# Altium PCB IPOD_LCD.PcbDoc
Units mil, origin at the board's own origin, x right, y up, seen from the top; angles counter-clockwise.
Board outline 3937 x 2759 mil, 2 copper layers (Top Layer, Bottom Layer); 55 components, 90 nets, 319 pads, 1517 vias.
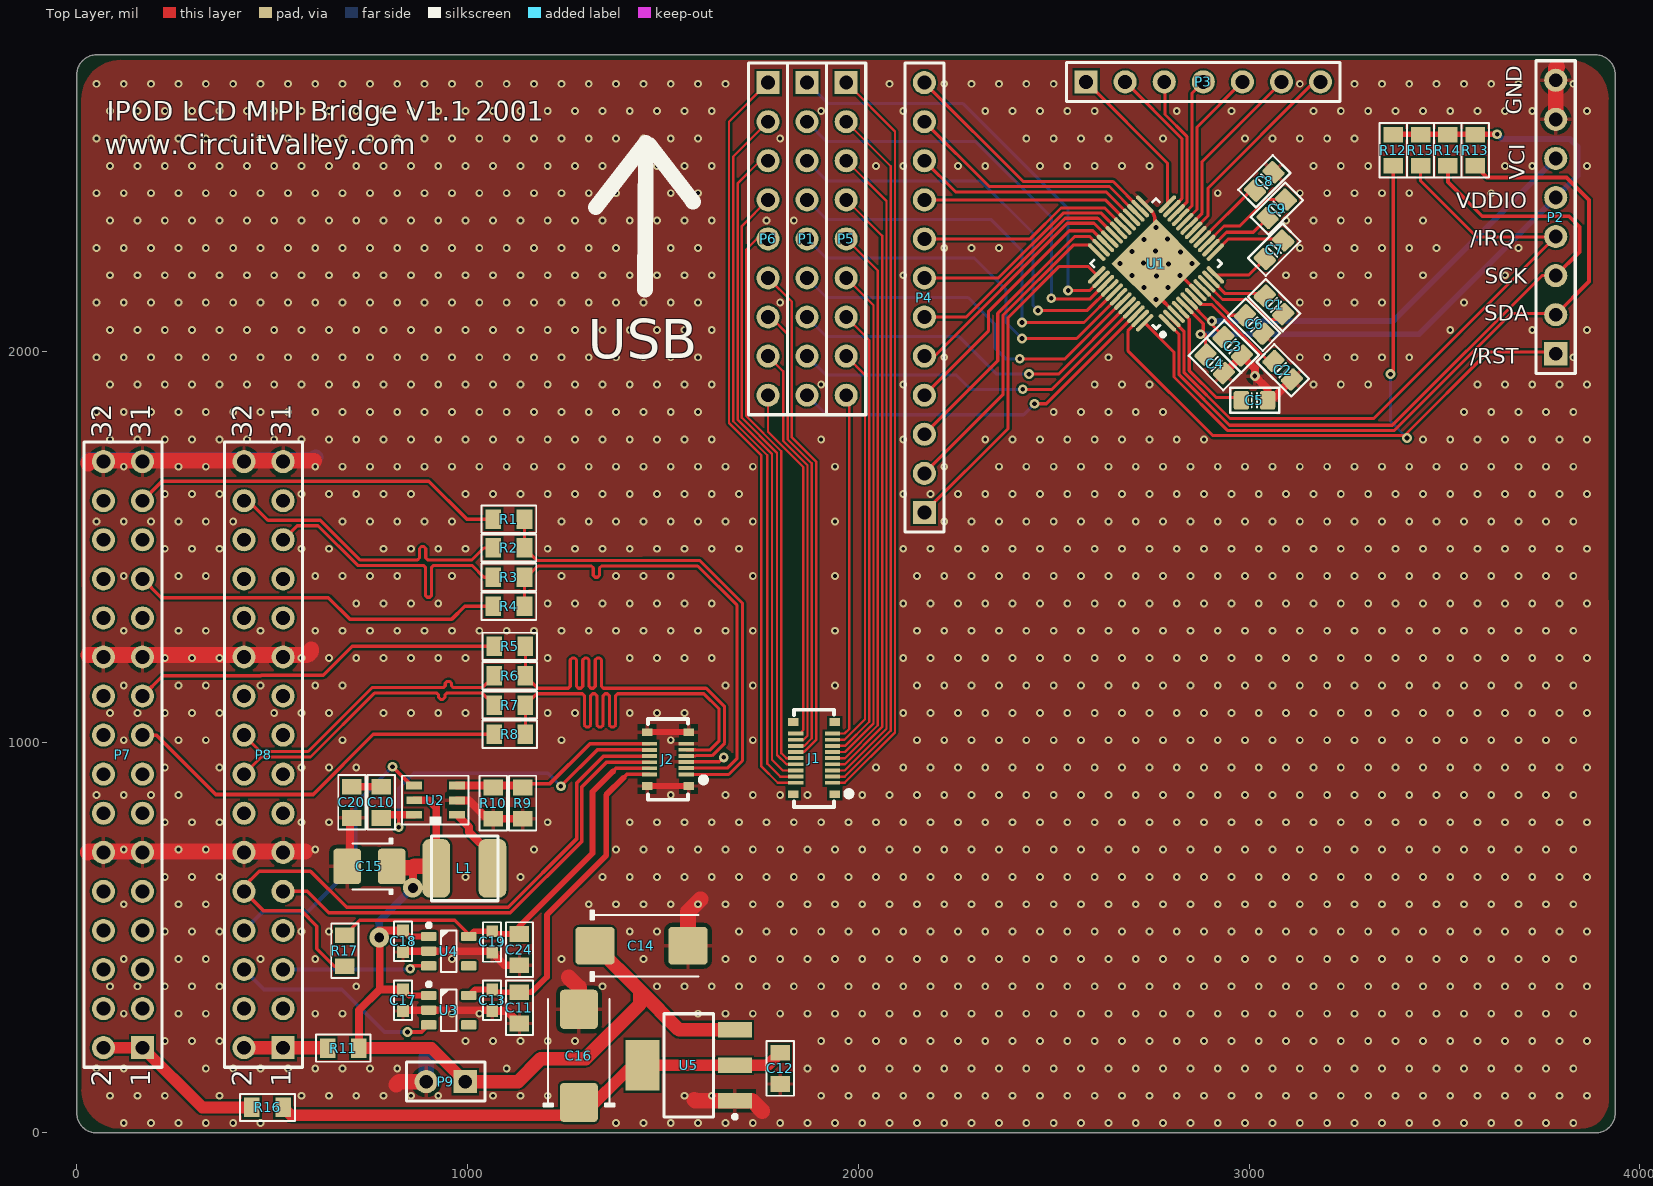
[diagram p0: Top Layer view]
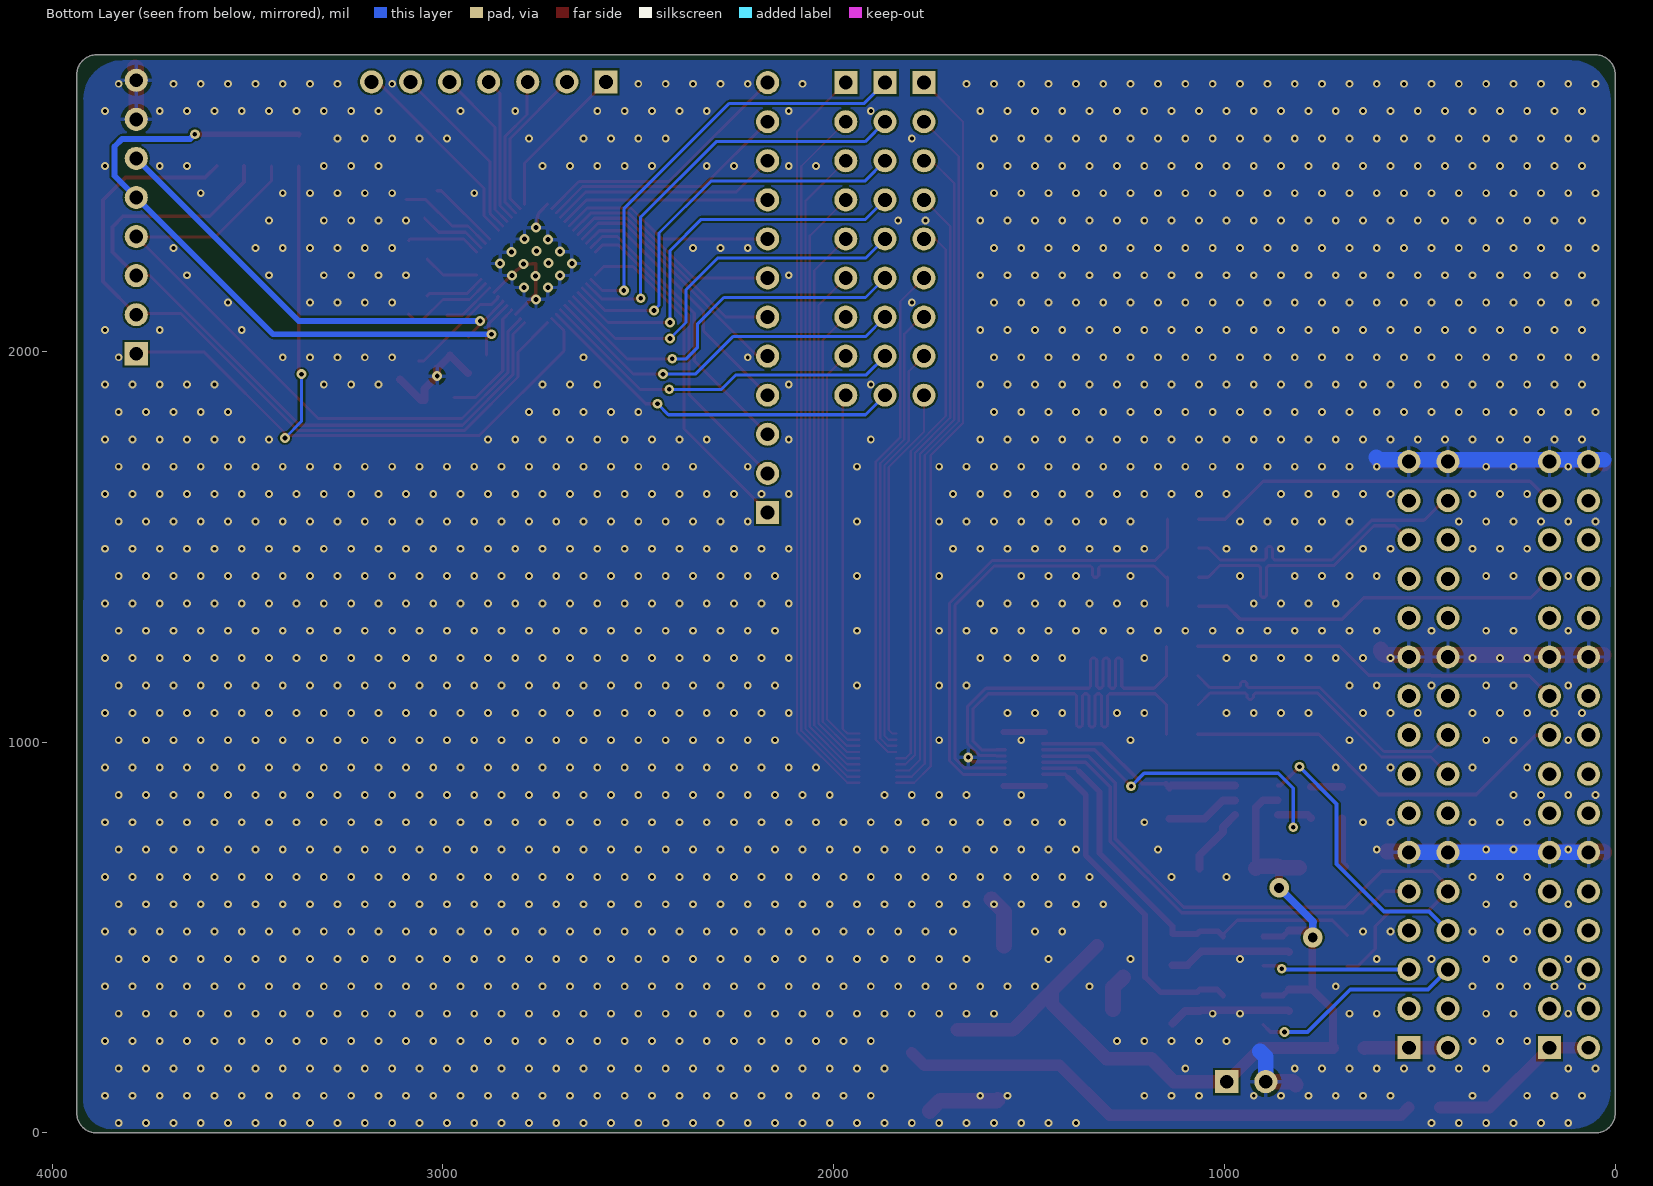
[diagram p1: Bottom Layer view, seen from below]

## Layer stack, top to bottom
Top Solder: solder mask 0.4, Solder Resist, Dk 3.5
Top Layer: signal copper 1.4
Dielectric 1: dielectric 12.6, FR-4, Dk 4.8
Bottom Layer: signal copper 1.4
Bottom Solder: solder mask 0.4, Solder Resist, Dk 3.5

## Board outline
0,50 0,2709 cw(c50,2709) 50,2759 3887,2759 cw(c3887,2709) 3937,2709 3937,50 cw(c3887,50) 3887,0 50,0 cw(c50,50)

## Design rules (kind name [scope] priority, off if disabled: settings)
Clearance [All] p1: gap=5
ComponentClearance [All] p1: gap=0 collisioncheckmode=3 verticalgap=0 showdistances=FALSE
DiffPairsRouting [All] p1: maxlimit=10 minlimit=6 mostfreqgap=6 toplayer_minwidth=6 toplayer_maxwidth=50 toplayer_prefwidth=10 bottomlayer_minwidth=6 bottomlayer_maxwidth=50 bottomlayer_prefwidth=10 maxuncoupledlength=500
MatchedLengths MIPI [InNetClass('MIPI')] p1: tolerance=10 checknetsindiffpair=TRUE checkdiffpairvsdiffpair=TRUE checkothers=TRUE
MatchedLengths MIPI2 [InNetClass('MIPI2')] p2: tolerance=10 checknetsindiffpair=TRUE checkdiffpairvsdiffpair=TRUE checkothers=TRUE
PolygonConnect [All] p1: connectstyle=Relief reliefconductorwidth=10 reliefentries=4 polygonreliefangle="90 Angle" airgapwidth=10
RoutingVias [All] p1: holewidth=12 width=25 viastyle="Through Hole" minholewidth=12 minwidth=25 maxholewidth=250 maxwidth=250
SolderMaskExpansion [All] p1: expansion=4
Width [All] p1: maxlimit=250 minlimit=6 preferedwidth=10
28 further rules are at their usual default settings.

## Classes and differential pairs
net class MIPI2: HS_CLK_N HS_CLK_P HS_DAT_N HS_DAT_P
net class MIPI: C_N C_P D_N D_P
differential pair C: +C_P -C_N
differential pair D: +D_P -D_N
differential pair HS_CLK: +HS_CLK_P -HS_CLK_N
differential pair HS_DAT: +HS_DAT_P -HS_DAT_N

## Components (designator, comment, footprint, x,y, rotation, side; value= is the part's Value field where it differs from the comment)
C1 "100n" CAPC1608N 3064,2119 r315 top
C2 "100n" CAPC1608N 3086,1952 r315 top
C3 "100n" CAPC1608N 2958,2013 r315 top
C4 "100n" CAPC1608N 2912,1968 r315 top
C5 "100n" CAPC1608N 3014,1875 r0 top
C6 "100n" CAPC1608N 3013,2069 r315 top
C7 "100n" CAPC1608N 3064,2260 r45 top
C8 "100n" CAPC1608N 3039,2435 r45 top
C9 "100n" CAPC1608N 3071,2365 r45 top
C10 "1uf" 0805C-TBD 778.76,815.99 r90 top
C11 "100n" 0805C-TBD 1132.76,349.99 r270 top
C12 "TBD" 0805C-TBD 1800,195 r270 top
C13 "100nf" 0603C-GENERIC 1062.76,311.99 r90 top
C14 "33uf 20V D" CAPMP7343X310N 1445,479 r0 top
C15 "10µ" CAPMP3528X210N 748.76,681.99 r180 top
C16 "33uf 20V D" CAPMP7343X310N 1285,197 r90 top
C17 "100nf" 0603C-GENERIC 834.76,311.99 r90 top
C18 "100nf" 0603C-GENERIC 834.76,462.99 r90 top
C19 "100nf" 0603C-GENERIC 1062.76,460.99 r90 top
C20 "1uf" 0805C-TBD 704,876 r270 top
C24 "100n" 0805C-TBD 1132.76,498.99 r270 top
J1 "5035481822" 5035481822 1886.76,958.99 r90 top
J2 "5035481222" 5035481222 1512.76,956.61 r90 top
L1 "10uH" IFSC-1515AH-01 992.76,676.99 r0 top
P1 "Header 9" HDR1X9 1868.65,2688 r270 top
P2 "Header 8" HDR1X8 3785,1994 r90 top
P3 "Header 7" HDR1X7 2583,2690 r0 top
P4 "Header 12" HDR1X12 2169,1588 r90 top
P5 "Header 9" HDR1X9 1969,2688 r270 top
P6 "Header 9" HDR1X9 1769,2688 r270 top
P7 "Header 16X2" HDR2X16 167.93,217.99 r90 top
P8 "Header 16X2" HDR2X16 527.76,217.99 r90 top
P9 "Header 2" HDR1X2 994,131 r180 top
R1 "110R" 0805R-GENERIC 1075.76,1570.99 r0 top
R2 "330R" 0805R-GENERIC 1075.76,1496.99 r0 top
R3 "330R" 0805R-GENERIC 1075.76,1421.99 r0 top
R4 "110R" 0805R-GENERIC 1075.76,1347.99 r0 top
R5 "110R" 0805R-GENERIC 1077.76,1244.99 r0 top
R6 "330R" 0805R-GENERIC 1077.76,1169.99 r0 top
R7 "330R" 0805R-GENERIC 1077.76,1094.99 r0 top
R8 "110R" 0805R-GENERIC 1077.76,1019.99 r0 top
R9 "47R" 0805R-GENERIC 1140.76,813.99 r90 top
R10 "22R" 0805R-GENERIC 1065.76,813.99 r90 top
R11 "0R" 0805R-GENERIC 711.76,216.99 r180 top
R12 "0R" 0805R-GENERIC 3369,2485 r90 top
R13 "0R" 0805R-GENERIC 3579,2485 r90 top
R14 "0R" 0805R-GENERIC 3509,2485 r90 top
R15 "0R" 0805R-GENERIC 3439,2485 r90 top
R16 "0R" 0805R-GENERIC 458,65 r0 top
R17 "10K" 0805R-GENERIC 686,436 r90 top
U1 "SSD2531QN5" QFN48_6x6_0.4 2762,2225 r135 top
U2 "MIC3289" SOT23-6 967.76,813.99 r180 top
U3 "MIC550x" SOT23-5 951.76,313.99 r0 top
U4 "MIC550x" SOT23-5 951.76,464.99 r0 top
U5 "TC2117-1.8VDBTR" SOT-223-DB3_N 1566,173 r180 top

## Footprints (in the part's own frame and the unit in brackets; to place one, negate y for a bottom-side part, rotate by r counter-clockwise, add the part's x,y. Pads: shape width x height; smd on the part's side, far side on the other; paste and mask are expansions set on the pad)
0603C-GENERIC [mil] "CAPACITOR 0603"
  rect 30x30 smd: 1(0,0) 2(55,0)
  silkscreen extent -23,-23 78,23, body extent -4,-15 59,15, height 19
0805C-TBD [mil] "CAPACITOR 0805"
  rect 40x50 smd: 1(-10,0) 2(70,0)
  silkscreen extent -40,-35 100,35, body extent -11,-25 70,25, height 26
0805R-GENERIC [mil] "RESISTOR 0805"
  rect 40x50 smd: 1(-10,0) 2(70,0)
  silkscreen extent -40,-35 100,35, body extent -11,-25 70,25, height 27
5035481222 [mm] "12 PIN IPOD LCD"
  rect 0.5x0.7 smd: 0(-1.75,-1.35) 0(-1.75,1.35) 0(1.75,-1.35) 0(1.75,1.35)
  rect 0.25x1 smd: 1(-1,-1.2) 2(-1,1.2) 3(-0.584,-1.2) 4(-0.6,1.2) 5(-0.178,-1.2) 6(-0.2,1.2) 7(0.203,-1.2) 8(0.2,1.2) 9(0.61,-1.2) 10(0.6,1.2) 11(1,-1.2) 12(1,1.2)
  silkscreen extent -2.64,-2.48 2.62,1.3, body extent -2.55,-1.3 2.55,1.3, height 0.67
5035481822 [mm] "IPOD Touch connector"
  rect 0.5x0.7 smd: 0(-2.35,-1.35) 0(-2.35,1.35) 0(2.35,-1.35) 0(2.35,1.35)
  rect 0.25x1 smd: 1(-1.6,-1.2) 2(-1.6,1.2) 3(-1.2,-1.2) 4(-1.2,1.2) 5(-0.8,-1.2) 6(-0.8,1.2) 7(-0.4,-1.2) 8(-0.4,1.2) 9(0,-1.2) 10(0,1.2) 11(0.4,-1.2) 12(0.4,1.2) 13(0.8,-1.2) 14(0.8,1.2) 15(1.2,-1.2) 16(1.2,1.2) 17(1.6,-1.2) 18(1.6,1.2)
  silkscreen extent -3.17,-2.43 3.15,1.3, body extent -3.15,-1.3 3.15,1.3, height 0.67
CAPC1608N [mm] "Chip Capacitor, Body 1.6x0.8mm, 0603, IPC Medium Density"
  round 0.254 on Mech14: 0(0,0)
  rrect25% 1x1.2 smd: 1(-0.85,0) 2(0.85,0)
  Top Layer pour cut-out: -0.4,0.6 0.4,0.6 0.4,-0.6 -0.4,-0.6
  silkscreen extent -1.57,-0.81 1.6,0.81, body extent -0.85,-0.45 0.85,0.45, height 0.89
CAPMP3528X210N [mm] "Molded body capacitor, Body 3.5x2.8mm, 1210, IPC Nominal settings"
  round 0.254 on Mech14: 0(0,0)
  rrect25% 1.8x2.3 smd: 1(-1.45,0) 2(1.45,0)
  Top Layer pour cut-out: -0.508,1.27 0.508,1.27 0.508,-1.27 -0.508,-1.27
  silkscreen extent -1.5,-1.8 1.1,1.8, body extent -1.75,-1.4 1.75,1.4, height 2.1
CAPMP7343X310N [mm] "Molded body capacitor, Body 7.3x4.3mm, 2917, IPC Nominal settings"
  round 1 on Mech14: 0(0,0)
  rrect20% 2.55x2.45 smd: 1(-3.025,0) 2(3.025,0)
  silkscreen extent -3.3,-2.3 3.7,2.3, body extent -3.8,-1.97 3.8,1.98, height 3.1
HDR1X2 [mm] "Connector; Header; 2 Position"
  rect 1.5x1.5 hole 0.9: 1(0,0)
  round 1.5 hole 0.9: 2(2.54,0)
  silkscreen extent -1.27,-1.27 3.81,1.27
HDR1X7 [mm] "Connector; Header; 7 Position"
  rect 1.5x1.5 hole 0.9: 1(0,0)
  round 1.5 hole 0.9: 2(2.54,0) 3(5.08,0) 4(7.62,0) 5(10.16,0) 6(12.7,0) 7(15.24,0)
  silkscreen extent -1.27,-1.27 16.51,1.27
HDR1X8 [mm] "Connector; Header; 8 Position"
  rect 1.5x1.5 hole 0.9: 1(0,0)
  round 1.5 hole 0.9: 2(2.54,0) 3(5.08,0) 4(7.62,0) 5(10.16,0) 6(12.7,0) 7(15.24,0) 8(17.78,0)
  silkscreen extent -1.27,-1.27 19.05,1.27
HDR1X9 [mm] "Connector; Header; 9 Position"
  rect 1.5x1.5 hole 0.9: 1(0,0)
  round 1.5 hole 0.9: 2(2.54,0) 3(5.08,0) 4(7.62,0) 5(10.16,0) 6(12.7,0) 7(15.24,0) 8(17.78,0) 9(20.32,0)
  silkscreen extent -1.27,-1.27 21.59,1.27
HDR1X12 [mm] "Connector; Header; 12 Position"
  rect 1.5x1.5 hole 0.9: 1(0,0)
  round 1.5 hole 0.9: 2(2.54,0) 3(5.08,0) 4(7.62,0) 5(10.16,0) 6(12.7,0) 7(15.24,0) 8(17.78,0) 9(20.32,0) 10(22.86,0) 11(25.4,0) 12(27.94,0)
  silkscreen extent -1.27,-1.27 29.21,1.27
HDR2X16 [mm] "Connector; Header; 16x2 Position"
  rect 1.5x1.5 hole 0.9: 1(0,0)
  round 1.5 hole 0.9: 2(0,2.54) 3(2.54,0) 4(2.54,2.54) 5(5.08,0) 6(5.08,2.54) 7(7.62,0) 8(7.62,2.54) 9(10.16,0) 10(10.16,2.54) 11(12.7,0) 12(12.7,2.54) 13(15.24,0) 14(15.24,2.54) 15(17.78,0) 16(17.78,2.54) 17(20.32,0) 18(20.32,2.54) 19(22.86,0) 20(22.86,2.54) 21(25.4,0) 22(25.4,2.54) 23(27.94,0) 24(27.94,2.54) 25(30.48,0) 26(30.48,2.54) 27(33.02,0) 28(33.02,2.54) 29(35.56,0) 30(35.56,2.54) 31(38.1,0) 32(38.1,2.54)
  silkscreen extent -1.27,-1.27 39.37,3.81
IFSC-1515AH-01 [mm] "Vishay Dale Low Profile, High Current Inductors"
  rrect50% 1.8x3.8 smd: 1(-1.85,0) 2(1.8,0)
  silkscreen extent -2.16,-2.11 2.16,2.11, body extent -1.97,-1.95 1.98,2, height 1.65
QFN48_6x6_0.4 [mm] "SSD2531"
  oval 1.5x0.27 smd: 1(-3.25,2.2) 2(-3.25,1.8) 3(-3.25,1.4) 4(-3.25,1) 5(-3.25,0.6) 6(-3.25,0.2) 7(-3.25,-0.2) 8(-3.25,-0.6) 9(-3.25,-1) 10(-3.25,-1.4) 11(-3.25,-1.8) 12(-3.25,-2.2) 25(3.25,-2.2) 26(3.25,-1.8) 27(3.25,-1.4) 28(3.25,-1) 29(3.25,-0.6) 30(3.25,-0.2) 31(3.25,0.2) 32(3.25,0.6) 33(3.25,1) 34(3.25,1.4) 35(3.25,1.8) 36(3.25,2.2)
  oval 0.27x1.5 smd: 13(-2.2,-3.25) 14(-1.8,-3.25) 15(-1.4,-3.25) 16(-1,-3.25) 17(-0.6,-3.25) 18(-0.2,-3.25) 19(0.2,-3.25) 20(0.6,-3.25) 21(1,-3.25) 22(1.4,-3.25) 23(1.8,-3.25) 24(2.2,-3.25) 37(2.2,3.25) 38(1.8,3.25) 39(1.4,3.25) 40(1,3.25) 41(0.6,3.25) 42(0.2,3.25) 43(-0.2,3.25) 44(-0.6,3.25) 45(-1,3.25) 46(-1.4,3.25) 47(-1.8,3.25) 48(-2.2,3.25)
  rect 4.1x4.1 smd: 49(0,0)
  silkscreen extent -3.71,-3.02 3.02,3.07, body extent -3.02,-3.02 3.02,3.02, height 0.68
SOT23-5 [mm]
  round 0.5 on Mech14: 0(0,0)
  rrect25% 1x0.6 smd: 1(-1.3,0.95) 2(-1.3,0) 3(-1.3,-0.95) 4(1.3,-0.95) 5(1.3,0.95)
  silkscreen extent -1.42,-1.35 0.51,1.81, body extent -1.4,-1.45 1.4,1.45, height 1.44
SOT23-6 [mil]
  rect 40x20 smd: 1(-5,0) 2(-5,-37) 3(-5,-75) 4(105,-75) 5(104.41,-37.4) 6(105,0)
  silkscreen extent -35,-100 135,25, body extent 2,-95 98,20, height 52
SOT-223-DB3_N [mm] "SOT223, 4-Leads, Body 6.5x3.5mm, Pitch 2.3mm, Lead Span 7mm, IPC Medium Density"
  rect 2.2x1 smd: 1(-3,2.3) 2(-3,0) 3(-3,-2.3)
  rect 2.2x3.3 smd: 4(3,0)
  silkscreen extent -3.13,-3.35 1.6,3.47, body extent -1.85,-3.35 1.85,3.35, height 1.8

## Part data
C1 C2 C3 C4 C5 C6 C7 C8 C9: library part CAPC_10p_0603_NP0_1%_50V, "Capacitor SMD Cer 10pF 5% 50V NP0 0603"
C10 C11 C12 C20 C24: library part 0805C-TBD, "CAPACITOR 0805 CERAMIC VALUE TO BE DETERMINED"
C13 C17 C18 C19: library part 0603C-10UF-6V3-X5R-MUR, "CAPACITOR 0603 CERAMIC"
C14 C16: library part CAPT_330u_2917_6V3, "Capacitor SMD Tant 330uF 20% 6V3 2917"
C15: library part CAPT_47u_1210_6V3, "Capacitor SMD Tantalum 47uF 20% 6.3V 1210"
J1: "5035481822 18 Pin Ipod Touch"
J2: "5035481222 12 Ipod lcd"
L1: library part inductor_smd
P1 P5 P6: "Header, 9-Pin"
P2: "Header, 8-Pin"
P3: "Header, 7-Pin"
P4: "Header, 12-Pin"
P7 P8: "Header, 16-Pin, Dual row"
P9: "Header, 2-Pin"
R1 R2 R3 R4 R5 R6 R7 R8 R9 R10 R11 R12 R13 R14 R15 R16 R17: library part 0805R-0R, "RESISTOR 0805 1 WATT"
U5: "800 mA Fixed Low Dropout Positive Regulator, 3-Pin SOT-223, Extended Temperature, Tape and Reel"

## Via types
v1: diameter 20, hole 10, Top Layer to Bottom Layer, tented both sides, 1478 vias
v2: diameter 25, hole 12, Top Layer to Bottom Layer, tented both sides, 21 vias
v3: diameter 25.98, hole 12.99, Top Layer to Bottom Layer, tented top, 16 vias
v4: diameter 50, hole 25, Top Layer to Bottom Layer, 2 vias

## Nets (pads, with @x,y where several pads share a name; then routed paths per layer and width w, separated by ;. In a path a pad name is that pad's centre, name@x,y a point inside that pad or via, vN(x,y) a via of type N, cw(c..) or ccw(c..) an arc to the next point about the centre after c; other vN are vias at no path point)
1V8: C19.2 C24.1 J2.4 R17.2 U4.5 | length 1103.6
  Top Layer w9: R17.2 724,544 967,544 1002.94,508.06 U4.5 ; 1371.76,924.99 1379.76,932.99 J2.4
  Top Layer w15: U4.5 1016.54,515.99 C19.2 1069.76,508.99 C24.1 1132.76,528.76 1319.76,715.76 1319.76,872.99 1371.76,924.99
3V: C11.1 C13.2 J2.2 U3.5 | length 886.7
  Top Layer w9: 1398.76,908.99 1407.01,917.24 J2.2
  Top Layer w15: U3.5 1018.54,366.99 C13.2 1069.76,359.99 C11.1 1163.76,359.99 1203,399.24 1203,558 1354.76,709.76 1354.76,864.99 1398.76,908.99
BL_EN: P8.8 U2.4 | length 718.7
  Top Layer w10: v2(808,937) 856.01,888.99 U2.4
  Bottom Layer w10: P8.8 476.76,567 592,567 713,688 713,842 v2(808,937)
C_N: J2.3 R3.2 R4.2 | length 1252.1
  Top Layer w8: R4.2 R3.2@1145.76,1416.99 ; R3.2 R3.2@1145.76,1416.99 ; J2.3 1664.76,933.61 1689.76,958.61 1689.76,1349.99 1588.76,1450.99 1397.76,1450.99 1342.56,1450.99 1337.76,1446.19 1337.76,1426.82 1332.96,1422.02 1326.56,1422.02 1321.76,1426.82 1321.76,1446.19 1316.96,1450.99 1305.76,1450.99 1297.76,1450.99 1179.76,1450.99 R3.2@1145.76,1416.99
C_P: J2.1 R1.2 R2.2 | length 1252.1
  Top Layer w8: R1.2 R2.2 1178.13,1464.61 1448.55,1464.61 ; 1448.55,1464.99 1594.55,1464.99 1703.76,1355.79 1703.76,952.82 1668.18,917.24 J2.1
CLK_LPN: P7.25 R4.1 | length 955
  Top Layer w9: P7.25 215.93,1369.99 643.76,1369.99 699.76,1313.99 958.76,1313.99 992.76,1347.99 R4.1
CLK_LPP: P7.29 R1.1 | length 958.7
  Top Layer w9: P7.29 217.93,1667.99 900.76,1667.99 997.76,1570.99 R1.1
D_N: J2.9 R7.2 R8.2 | length 1253.1
  Top Layer w8: R8.2 R7.2 1176.76,1123.99 1274.76,1123.99 1282.76,1123.99 1293.96,1123.99 1298.76,1119.19 1298.76,1043.45 1303.56,1038.65 1309.96,1038.65 1314.76,1043.45 1314.76,1119.19 1319.56,1123.99 1325.96,1123.99 1330.76,1119.19 1330.76,1043.45 1335.56,1038.65 1341.96,1038.65 1346.76,1043.45 1346.76,1119.19 1351.56,1123.99 1357.96,1123.99 1362.76,1119.19 1362.76,1043.45 1367.56,1038.65 1373.96,1038.65 1378.76,1043.45 1378.76,1119.19 1383.56,1123.99 1455.76,1123.99 1604.76,1123.99 1643.76,1084.99 1643.76,1003.41 1619.96,979.61 1584.68,979.61 1583.68,980.61 J2.9
D_P: J2.7 R5.2 R6.2 | length 1253.1
  Top Layer w8: R5.2 R6.2 1179.76,1137.99 1254.76,1137.99 1257.96,1137.99 1262.76,1142.79 1262.76,1210.6 1267.56,1215.4 1273.96,1215.4 1278.76,1210.6 1278.76,1142.79 1283.56,1137.99 1289.96,1137.99 1294.76,1142.79 1294.76,1210.6 1299.56,1215.4 1305.96,1215.4 1310.76,1210.6 1310.76,1142.79 1315.56,1137.99 1321.96,1137.99 1326.76,1142.79 1326.76,1210.6 1331.56,1215.4 1337.96,1215.4 1342.76,1210.6 1342.76,1142.79 1347.56,1137.99 1492.76,1137.99 1610.55,1137.99 1657.76,1090.79 1657.76,997.61 1625.76,965.61 1584.68,965.61 1583.68,964.61 J2.7
DATA_LPN: P7.17 R8.1 | length 1026.6
  Top Layer w9: P7.17 203.76,1017.99 355.76,865.99 604.76,865.99 758.76,1019.99 R8.1
DATA_LPP: P7.19 R5.1 | length 952.4
  Top Layer w9: P7.19 219.93,1169.99 470.76,1169.99 471.76,1170.99 630.76,1170.99 704.76,1244.99 R5.1
DRIVE3: P3.7 U1.18 | length 524.1
  Top Layer w8: U1.18 2895,2346.86 2895,2418 3167,2690 P3.7
DRIVE4: P3.6 U1.19 | length 466.7
  Top Layer w8: U1.19 2880,2354.14 2880,2486 3083,2689 P3.6
DRIVE5: P3.5 U1.20 | length 418.8
  Top Layer w8: U1.20 2867,2363.41 2867,2574 P3.5
DRIVE6: P3.4 U1.21 | length 370.9
  Top Layer w8: U1.21 2854,2372.68 2854,2661 P3.4
DRIVE7: P3.3 U1.22 | length 371
  Top Layer w8: P3.3 2785,2688 2785,2606.38 2841,2550.38 2841,2381.95 U1.22
DRIVE8: P3.2 U1.23 | length 395.1
  Top Layer w8: P3.2 2828,2545 2828,2391.22 U1.23
DRIVE9: P3.1 U1.24 | length 399.5
  Top Layer w8: P3.1 2791.23,2481.77 U1.24
DRIVE10: P1.9 U1.46 | length 969.2
  Top Layer w8: v2(2451,1866) 2480.95,1866 U1.46
  Bottom Layer w8: P1.9 1918.65,1838 2423,1838 v2(2451,1866)
DRIVE11: P1.8 U1.45 | length 950.3
  Top Layer w8: v2(2421,1903) 2495.68,1903 U1.45
  Bottom Layer w8: P1.8 1916.65,1940 2250,1940 2287,1903 v2(2421,1903)
DRIVE12: P1.7 U1.44 | length 952.9
  Top Layer w8: v2(2437,1942) 2512.41,1942 U1.44
  Bottom Layer w8: P1.7 1918.65,2038 2258,2038 2354,1942 v2(2437,1942)
DRIVE13: P1.6 U1.43 | length 991.2
  Top Layer w8: v2(2413,1981) 2529.14,1981 U1.43
  Bottom Layer w8: P1.6 1918.65,2138 2281,2138 2349,2070 2349,2009 2377,1981 v2(2413,1981)
DRIVE14: P1.5 U1.42 | length 996.5
  Top Layer w8: v2(2419,2033) 2558.86,2033 U1.42
  Bottom Layer w8: P1.5 1917.65,2239 2297,2239 2378,2158 2378,2074 v2(2419,2033)
DRIVE15: P1.4 U1.41 | length 1056
  Top Layer w8: v2(2419,2074) 2577.59,2074 U1.41
  Bottom Layer w8: P1.4 1918.65,2338 2339,2338 2419,2258 v2(2419,2074)
DRIVE16: P1.3 U1.40 | length 1065.8
  Top Layer w8: v2(2460,2105) 2586.32,2105 U1.40
  Bottom Layer w8: P1.3 1920.65,2436 2314,2436 2447,2303 2447,2118 v2(2460,2105)
DRIVE17: P1.2 U1.39 | length 1089.7
  Top Layer w8: v2(2494,2136) 2495.5,2134.5 2593.55,2134.5 U1.39
  Bottom Layer w8: P1.2 1919.65,2537 2301,2537 2494,2344 v2(2494,2136)
DRIVE18: P1.1 U1.38 | length 1107.4
  Top Layer w8: v2(2537,2156) 2592.78,2156 U1.38
  Bottom Layer w8: P1.1 1921.65,2635 2267,2635 2537,2365 v2(2537,2156)
GND: C2.2 C3.2 C4.2 C5.2 C6.2 C8.2 C11.2 C12.2 C13.1 C14.2 C15.2 C16.2 C17.1 C18.1 C19.1 C20.2 C24.2 J2.0 J2.5 J2.11 P2.7 P2.8 P7.11 P7.12 P7.21 P7.22 P7.31 P7.32 P8.11 P8.12 P8.21 P8.22 P8.31 P8.32 P9.2 R9.1 R10.1 U1.3 U1.8 U1.17 U1.25 U1.49 U2.2 U3.2 U4.2 U5.1 | length 5373.4
  Top Layer w9: J2.5 1644.38,949.61 v2(1655.76,960.99) ; U1.25 2750.17,2359.32 cw(c2728.84,2338) 2759,2338 2759,2324.17 ccw(c2769.24,2324.17) v3(2762,2316.92) ; U1.3 2762,2147.05 U1.49 cw(c2762,2144.35) 2819.03,2201.38 U1.8
  Top Layer w15: J2.0@1459.61,887.72 J2.0@1565.91,887.72 ; J2.0@1459.61,1025.51 J2.0@1565.91,1025.51
  Top Layer w20: C15.2 698.76,689.08 C20.2@698.76,804.99 ; C17.1 836.76,313.99 U3.2 1060.76,313.99 C13.1 1100.76,311.99 C11.2 ; C18.1 836.76,464.99 U4.2 1058.76,464.99 C19.1 1094.76,428.99 C24.2 ; U2.2 1003.76,850.99 1050.76,803.99 R10.1 R9.1 ; C4.2 2936.66,1944.34 C3.2 3015,1956 v2(3015,1937) 3047.46,1904.54 C5.2 3056.33,1875 C2.2
  Top Layer w40: 28,717 cw(c31,717) 31,720 584,720 ; 28.72,1222.99 585.99,1222.99 ccw(c585.99,1237) 600,1237 ; 28.72,1712.99 cw(c35.73,1712.99) 35.73,1720 607,1720 ; 817,123 825,131 P9.2 ; 1259,398 1285,372 C16.2 ; C14.2 1564.09,566.09 1596,598 ; 1580,85 1582.55,82.45 U5.1 1727.55,82.45 1754,56 ; P2.7 P2.8 3785,2723 cw(c3789,2723) 3789,2727
  Bottom Layer w40: 28.72,1722.99 604.99,1722.99 611,1729 ; P7.12 P7.11 P8.12 P8.11 ; P9.2 894,194 909,209
  other v1: 120,25 190,25 260,25 330,25 400,25 470,25 1380,25 1450,25 1520,25 1590,25 1660,25 1730,25 1800,25 1870,25 1940,25 2010,25 2080,25 2150,25 2220,25 2290,25 2360,25 2430,25 2500,25 2570,25 2640,25 2710,25 2780,25 2850,25 2920,25 2990,25 3060,25 3130,25 3200,25 3270,25 3340,25 3410,25 3480,25 3550,25 3620,25 3690,25 3760,25 3830,25 85,95 155,95 225,95 365,95 575,95 645,95 715,95 785,95 855,95 925,95 1065,95 1135,95 1205,95 1555,95 1625,95 1905,95 1975,95 2045,95 2115,95 2185,95 2255,95 2325,95 2395,95 2465,95 2535,95 2605,95 2675,95 2745,95 2815,95 2885,95 2955,95 3025,95 3095,95 3165,95 3235,95 3305,95 3375,95 3445,95 3515,95 3585,95 3655,95 3725,95 3795,95 3865,95 50,165 120,165 330,165 400,165 470,165 540,165 610,165 680,165 750,165 820,165 1100,165 1870,165 1940,165 2010,165 2080,165 2150,165 2220,165 2290,165 2360,165 2430,165 2500,165 2570,165 2640,165 2710,165 2780,165 2850,165 2920,165 2990,165 3060,165 3130,165 3200,165 3270,165 3340,165 3410,165 3480,165 3550,165 3620,165 3690,165 3760,165 3830,165 225,235 295,235 365,235 995,235 1065,235 1135,235 1205,235 1275,235 1905,235 1975,235 2045,235 2115,235 2185,235 2255,235 2325,235 2395,235 2465,235 2535,235 2605,235 2675,235 2745,235 2815,235 2885,235 2955,235 3025,235 3095,235 3165,235 3235,235 3305,235 3375,235 3445,235 3515,235 3585,235 3655,235 3725,235 3795,235 3865,235 120,305 260,305 330,305 610,305 680,305 960,305 1030,305 1590,305 1660,305 1730,305 1800,305 1870,305 1940,305 2010,305 2080,305 2150,305 2220,305 2290,305 2360,305 2430,305 2500,305 2570,305 2640,305 2710,305 2780,305 2850,305 2920,305 2990,305 3060,305 3130,305 3200,305 3270,305 3340,305 3410,305 3480,305 3550,305 3620,305 3690,305 3760,305 3830,305 85,375 155,375 225,375 295,375 365,375 715,375 1345,375 1485,375 1555,375 1625,375 1695,375 1765,375 1835,375 1905,375 1975,375 2045,375 2115,375 2185,375 2255,375 2325,375 2395,375 2465,375 2535,375 2605,375 2675,375 2745,375 2815,375 2885,375 2955,375 3025,375 3095,375 3165,375 3235,375 3305,375 3375,375 3445,375 3515,375 3585,375 3655,375 3725,375 3795,375 3865,375 120,445 260,445 330,445 470,445 610,445 960,445 1240,445 1450,445 1660,445 1730,445 1800,445 1870,445 1940,445 2010,445 2080,445 2150,445 2220,445 2290,445 2360,445 2430,445 2500,445 2570,445 2640,445 2710,445 2780,445 2850,445 2920,445 2990,445 3060,445 3130,445 3200,445 3270,445 3340,445 3410,445 3480,445 3550,445 3620,445 3690,445 3760,445 3830,445 225,515 295,515 365,515 575,515 645,515 1415,515 1485,515 1695,515 1765,515 1835,515 1905,515 1975,515 2045,515 2115,515 2185,515 2255,515 2325,515 2395,515 2465,515 2535,515 2605,515 2675,515 2745,515 2815,515 2885,515 2955,515 3025,515 3095,515 3165,515 3235,515 3305,515 3375,515 3445,515 3515,515 3585,515 3655,515 3725,515 3795,515 3865,515 120,585 260,585 330,585 1310,585 1380,585 1450,585 1520,585 1590,585 1660,585 1730,585 1800,585 1870,585 1940,585 2010,585 2080,585 2150,585 2220,585 2290,585 2360,585 2430,585 2500,585 2570,585 2640,585 2710,585 2780,585 2850,585 2920,585 2990,585 3060,585 3130,585 3200,585 3270,585 3340,585 3410,585 3480,585 3550,585 3620,585 3690,585 3760,585 3830,585 225,655 295,655 365,655 995,655 1135,655 1345,655 1415,655 1485,655 1555,655 1625,655 1695,655 1765,655 1835,655 1905,655 1975,655 2045,655 2115,655 2185,655 2255,655 2325,655 2395,655 2465,655 2535,655 2605,655 2675,655 2745,655 2815,655 2885,655 2955,655 3025,655 3095,655 3165,655 3235,655 3305,655 3375,655 3445,655 3515,655 3585,655 3655,655 3725,655 3795,655 3865,655 120,725 260,725 330,725 610,725 1170,725 1380,725 1450,725 1520,725 1590,725 1660,725 1730,725 1800,725 1870,725 1940,725 2010,725 2080,725 2150,725 2220,725 2290,725 2360,725 2430,725 2500,725 2570,725 2640,725 2710,725 2780,725 2850,725 2920,725 2990,725 3060,725 3130,725 3200,725 3270,725 3340,725 3410,725 3480,725 3550,725 3620,725 3690,725 3760,725 3830,725 225,795 295,795 365,795 575,795 645,795 1205,795 1415,795 1485,795 1555,795 1625,795 1695,795 1765,795 1835,795 1905,795 1975,795 2045,795 2115,795 2185,795 2255,795 2325,795 2395,795 2465,795 2535,795 2605,795 2675,795 2745,795 2815,795 2885,795 2955,795 3025,795 3095,795 3165,795 3235,795 3305,795 3375,795 3445,795 3515,795 3585,795 3655,795 3725,795 3795,795 3865,795 50,865 120,865 190,865 260,865 1520,865 1660,865 1730,865 1800,865 1870,865 2010,865 2080,865 2150,865 2220,865 2290,865 2360,865 2430,865 2500,865 2570,865 2640,865 2710,865 2780,865 2850,865 2920,865 2990,865 3060,865 3130,865 3200,865 3270,865 3340,865 3410,865 3480,865 3550,865 3620,865 3690,865 3760,865 3830,865 225,935 365,935 575,935 645,935 715,935 2045,935 2115,935 2185,935 2255,935 2325,935 2395,935 2465,935 2535,935 2605,935 2675,935 2745,935 2815,935 2885,935 2955,935 3025,935 3095,935 3165,935 3235,935 3305,935 3375,935 3445,935 3515,935 3585,935 3655,935 3725,935 3795,935 3865,935 120,1005 260,1005 330,1005 680,1005 1240,1005 1520,1005 1730,1005 2150,1005 2220,1005 2290,1005 2360,1005 2430,1005 2500,1005 2570,1005 2640,1005 2710,1005 2780,1005 2850,1005 2920,1005 2990,1005 3060,1005 3130,1005 3200,1005 3270,1005 3340,1005 3410,1005 3480,1005 3550,1005 3620,1005 3690,1005 3760,1005 3830,1005 85,1075 155,1075 225,1075 295,1075 365,1075 505,1075 575,1075 645,1075 785,1075 855,1075 925,1075 995,1075 1205,1075 1275,1075 1415,1075 1485,1075 1555,1075 2115,1075 2185,1075 2255,1075 2325,1075 2395,1075 2465,1075 2535,1075 2605,1075 2675,1075 2745,1075 2815,1075 2885,1075 2955,1075 3025,1075 3095,1075 3165,1075 3235,1075 3305,1075 3375,1075 3445,1075 3515,1075 3585,1075 3655,1075 3725,1075 3795,1075 3865,1075 120,1145 260,1145 330,1145 470,1145 610,1145 680,1145 1660,1145 1730,1145 1940,1145 2150,1145 2220,1145 2290,1145 2360,1145 2430,1145 2500,1145 2570,1145 2640,1145 2710,1145 2780,1145 2850,1145 2920,1145 2990,1145 3060,1145 3130,1145 3200,1145 3270,1145 3340,1145 3410,1145 3480,1145 3550,1145 3620,1145 3690,1145 3760,1145 3830,1145 225,1215 295,1215 365,1215 575,1215 645,1215 715,1215 785,1215 855,1215 925,1215 995,1215 1205,1215 1415,1215 1485,1215 1555,1215 1625,1215 2115,1215 2185,1215 2255,1215 2325,1215 2395,1215 2465,1215 2535,1215 2605,1215 2675,1215 2745,1215 2815,1215 2885,1215 2955,1215 3025,1215 3095,1215 3165,1215 3235,1215 3305,1215 3375,1215 3445,1215 3515,1215 3585,1215 3655,1215 3725,1215 3795,1215 3865,1215 120,1285 260,1285 330,1285 470,1285 610,1285 680,1285 750,1285 820,1285 890,1285 960,1285 1030,1285 1100,1285 1170,1285 1240,1285 1310,1285 1380,1285 1450,1285 1520,1285 1590,1285 1660,1285 1730,1285 1940,1285 2150,1285 2220,1285 2290,1285 2360,1285 2430,1285 2500,1285 2570,1285 2640,1285 2710,1285 2780,1285 2850,1285 2920,1285 2990,1285 3060,1285 3130,1285 3200,1285 3270,1285 3340,1285 3410,1285 3480,1285 3550,1285 3620,1285 3690,1285 3760,1285 3830,1285 715,1355 785,1355 855,1355 925,1355 1205,1355 1275,1355 1345,1355 1415,1355 1485,1355 1555,1355 1625,1355 2115,1355 2185,1355 2255,1355 2325,1355 2395,1355 2465,1355 2535,1355 2605,1355 2675,1355 2745,1355 2815,1355 2885,1355 2955,1355 3025,1355 3095,1355 3165,1355 3235,1355 3305,1355 3375,1355 3445,1355 3515,1355 3585,1355 3655,1355 3725,1355 3795,1355 3865,1355 120,1425 260,1425 330,1425 610,1425 680,1425 750,1425 820,1425 960,1425 1240,1425 1380,1425 1450,1425 1520,1425 1730,1425 1940,1425 2150,1425 2220,1425 2290,1425 2360,1425 2430,1425 2500,1425 2570,1425 2640,1425 2710,1425 2780,1425 2850,1425 2920,1425 2990,1425 3060,1425 3130,1425 3200,1425 3270,1425 3340,1425 3410,1425 3480,1425 3550,1425 3620,1425 3690,1425 3760,1425 3830,1425 225,1495 295,1495 365,1495 575,1495 645,1495 785,1495 855,1495 925,1495 995,1495 1205,1495 1275,1495 1345,1495 1415,1495 1485,1495 1555,1495 1625,1495 1695,1495 2115,1495 2185,1495 2255,1495 2325,1495 2395,1495 2465,1495 2535,1495 2605,1495 2675,1495 2745,1495 2815,1495 2885,1495 2955,1495 3025,1495 3095,1495 3165,1495 3235,1495 3305,1495 3375,1495 3445,1495 3515,1495 3585,1495 3655,1495 3725,1495 3795,1495 3865,1495 50,1565 120,1565 190,1565 260,1565 330,1565 400,1565 680,1565 750,1565 820,1565 890,1565 960,1565 1240,1565 1310,1565 1380,1565 1450,1565 1520,1565 1590,1565 1660,1565 1730,1565 1940,1565 2220,1565 2290,1565 2360,1565 2430,1565 2500,1565 2570,1565 2640,1565 2710,1565 2780,1565 2850,1565 2920,1565 2990,1565 3060,1565 3130,1565 3200,1565 3270,1565 3340,1565 3410,1565 3480,1565 3550,1565 3620,1565 3690,1565 3760,1565 3830,1565 225,1635 295,1635 365,1635 575,1635 645,1635 715,1635 785,1635 855,1635 995,1635 1065,1635 1135,1635 1205,1635 1275,1635 1345,1635 1415,1635 1485,1635 1555,1635 1625,1635 1695,1635 2115,1635 2185,1635 2255,1635 2325,1635 2395,1635 2465,1635 2535,1635 2605,1635 2675,1635 2745,1635 2815,1635 2885,1635 2955,1635 3025,1635 3095,1635 3165,1635 3235,1635 3305,1635 3375,1635 3445,1635 3515,1635 3585,1635 3655,1635 3725,1635 3795,1635 3865,1635 120,1705 260,1705 330,1705 610,1705 680,1705 750,1705 820,1705 890,1705 960,1705 1030,1705 1100,1705 1170,1705 1240,1705 1310,1705 1380,1705 1450,1705 1520,1705 1590,1705 1660,1705 1730,1705 1940,1705 2220,1705 2360,1705 2430,1705 2500,1705 2570,1705 2640,1705 2710,1705 2780,1705 2850,1705 2920,1705 2990,1705 3060,1705 3130,1705 3200,1705 3270,1705 3340,1705 3410,1705 3480,1705 3550,1705 3620,1705 3690,1705 3760,1705 3830,1705 85,1775 155,1775 225,1775 295,1775 365,1775 435,1775 505,1775 575,1775 645,1775 715,1775 785,1775 855,1775 925,1775 995,1775 1065,1775 1135,1775 1205,1775 1275,1775 1345,1775 1415,1775 1485,1775 1555,1775 1625,1775 1905,1775 2115,1775 2325,1775 2395,1775 2465,1775 2535,1775 2605,1775 2675,1775 2745,1775 2815,1775 2885,1775 3445,1775 3515,1775 3585,1775 3655,1775 3725,1775 3795,1775 3865,1775 50,1845 120,1845 190,1845 260,1845 330,1845 400,1845 470,1845 540,1845 610,1845 680,1845 750,1845 820,1845 890,1845 960,1845 1030,1845 1100,1845 1170,1845 1240,1845 1310,1845 1380,1845 1450,1845 1520,1845 1590,1845 2500,1845 2570,1845 2640,1845 2710,1845 2780,1845 3550,1845 3620,1845 3690,1845 3760,1845 3830,1845 85,1915 155,1915 225,1915 295,1915 365,1915 435,1915 505,1915 575,1915 645,1915 715,1915 785,1915 855,1915 925,1915 995,1915 1065,1915 1135,1915 1205,1915 1275,1915 1345,1915 1415,1915 1485,1915 1555,1915 1625,1915 1905,1915 2115,1915 2605,1915 2675,1915 2745,1915 3165,1915 3235,1915 3305,1915 3585,1915 3655,1915 3725,1915 3795,1915 3865,1915 50,1985 120,1985 190,1985 260,1985 330,1985 400,1985 470,1985 540,1985 610,1985 680,1985 750,1985 820,1985 890,1985 960,1985 1030,1985 1100,1985 1170,1985 1240,1985 1310,1985 1380,1985 1450,1985 1520,1985 1590,1985 2220,1985 2640,1985 3130,1985 3200,1985 3270,1985 3340,1985 3410,1985 3830,1985 85,2055 155,2055 225,2055 295,2055 365,2055 435,2055 505,2055 575,2055 645,2055 715,2055 785,2055 855,2055 925,2055 995,2055 1065,2055 1135,2055 1205,2055 1275,2055 1345,2055 1415,2055 1485,2055 1555,2055 1625,2055 3515,2055 3725,2055 3865,2055 50,2125 120,2125 190,2125 260,2125 330,2125 400,2125 470,2125 540,2125 610,2125 680,2125 750,2125 820,2125 890,2125 960,2125 1030,2125 1100,2125 1170,2125 1240,2125 1310,2125 1380,2125 1450,2125 1520,2125 1590,2125 1800,2125 3130,2125 3200,2125 3270,2125 3340,2125 3550,2125 85,2195 155,2195 225,2195 295,2195 365,2195 435,2195 505,2195 575,2195 645,2195 715,2195 785,2195 855,2195 925,2195 995,2195 1065,2195 1135,2195 1205,2195 1275,2195 1345,2195 1415,2195 1485,2195 1555,2195 1625,2195 2115,2195 3095,2195 3165,2195 3235,2195 3305,2195 3445,2195 3655,2195 50,2265 120,2265 190,2265 260,2265 330,2265 400,2265 470,2265 540,2265 610,2265 680,2265 750,2265 820,2265 890,2265 960,2265 1030,2265 1100,2265 1170,2265 1240,2265 1310,2265 1380,2265 1450,2265 1520,2265 1590,2265 2220,2265 2290,2265 2360,2265 3130,2265 3200,2265 3270,2265 3340,2265 3410,2265 3480,2265 3690,2265 85,2335 155,2335 225,2335 295,2335 365,2335 435,2335 505,2335 575,2335 645,2335 715,2335 785,2335 855,2335 925,2335 995,2335 1065,2335 1135,2335 1205,2335 1275,2335 1345,2335 1415,2335 1485,2335 1555,2335 1625,2335 1765,2335 1835,2335 3095,2335 3165,2335 3235,2335 3305,2335 3445,2335 50,2405 120,2405 190,2405 260,2405 330,2405 400,2405 470,2405 540,2405 610,2405 680,2405 750,2405 820,2405 890,2405 960,2405 1030,2405 1100,2405 1170,2405 1240,2405 1310,2405 1380,2405 1450,2405 1520,2405 1590,2405 2920,2405 3130,2405 3200,2405 3270,2405 3340,2405 3410,2405 3620,2405 85,2475 155,2475 225,2475 295,2475 365,2475 435,2475 505,2475 575,2475 645,2475 715,2475 785,2475 855,2475 925,2475 995,2475 1065,2475 1135,2475 1205,2475 1275,2475 1345,2475 1415,2475 1485,2475 1555,2475 1625,2475 2045,2475 2115,2475 2255,2475 2325,2475 2465,2475 2535,2475 2605,2475 2675,2475 2745,2475 3165,2475 3235,2475 3305,2475 3655,2475 3725,2475 3865,2475 50,2545 120,2545 190,2545 260,2545 330,2545 400,2545 470,2545 540,2545 610,2545 680,2545 750,2545 820,2545 890,2545 960,2545 1030,2545 1100,2545 1170,2545 1240,2545 1310,2545 1380,2545 1450,2545 1520,2545 1590,2545 1800,2545 2430,2545 2500,2545 2570,2545 2640,2545 2780,2545 2990,2545 3060,2545 3130,2545 3200,2545 3270,2545 85,2615 155,2615 225,2615 295,2615 365,2615 435,2615 505,2615 575,2615 645,2615 715,2615 785,2615 855,2615 925,2615 995,2615 1065,2615 1135,2615 1205,2615 1275,2615 1345,2615 1415,2615 1485,2615 1555,2615 1625,2615 1905,2615 2115,2615 2325,2615 2395,2615 2465,2615 2535,2615 2605,2615 2815,2615 2955,2615 3165,2615 3235,2615 3305,2615 3375,2615 3445,2615 3515,2615 3585,2615 3655,2615 3725,2615 3865,2615 50,2685 120,2685 190,2685 260,2685 330,2685 400,2685 470,2685 540,2685 610,2685 680,2685 750,2685 820,2685 890,2685 960,2685 1030,2685 1100,2685 1170,2685 1240,2685 1310,2685 1380,2685 1450,2685 1520,2685 1590,2685 1660,2685 2080,2685 2220,2685 2290,2685 2360,2685 2430,2685 2500,2685 3130,2685 3270,2685 3340,2685 3410,2685 3480,2685 3550,2685 3620,2685 3690,2685 3830,2685
  other v3: 2762,2133.08 2731.36,2163.72 2792.64,2163.72 2763.38,2192.98 2700.72,2194.36 2823.28,2194.36 2794.02,2223.62 2670.08,2225 2853.92,2225 2729.98,2226.38 2824.67,2254.26 2700.72,2255.64 2760.62,2257.02 2731.36,2286.28 2791.26,2287.67
HS_CLK_N: P8.27 R3.1 | length 759.3
  Top Layer w8: P8.27 563.76,1553.99 616.96,1553.99 718.46,1452.49 868,1452.49 876,1452.49 887.2,1452.49 892,1447.69 892,1375.79 896.8,1370.99 903.2,1370.99 908,1375.79 908,1447.69 912.8,1452.49 918,1452.49 1011.26,1452.49 1041.76,1421.99 R3.1
HS_CLK_P: P8.30 R2.1 | length 759.3
  Top Layer w8: P8.30@438.76,1617.99 488.76,1567.99 622.76,1567.99 724.26,1466.49 869,1466.49 872.2,1466.49 877,1471.29 877,1495.79 881.8,1500.59 888.2,1500.59 893,1495.79 893,1471.29 897.8,1466.49 931,1466.49 1011.26,1466.49 1041.76,1496.99 R2.1
HS_DAT_N: P8.16 R7.1 | length 759.3
  Top Layer w8: P8.16 471.76,961.99 597.76,961.99 761.26,1125.49 901.76,1125.49 909.76,1125.49 920.96,1125.49 925.76,1120.69 925.76,1114.29 930.56,1109.49 936.96,1109.49 941.76,1114.29 941.76,1120.69 946.56,1125.49 954.76,1125.49 1037.26,1125.49 R7.1
HS_DAT_P: P8.18 R6.1 | length 758.5
  Top Layer w8: P8.18 469.76,975.99 591.96,975.99 755.46,1139.49 934.76,1139.49 937.96,1139.49 942.76,1144.29 942.76,1150.69 947.56,1155.49 953.96,1155.49 958.76,1150.69 958.76,1144.29 963.56,1139.49 974.76,1139.49 1037.26,1139.49 R6.1
I\R\Q\: P2.4 R15.1 U1.2 | length 1787.3
  Top Layer w8: U1.2 2802.37,2082.39 2834,2050.75 2834,1945.38 2951.19,1828.19 3319.19,1828.19 P2.4@3784,2293 ; R15.1 3439,2437 3583,2293 P2.4@3784,2293 ; P2.4 P2.4@3784,2293
LED+: C10.1 J2.10 U2.6 | length 929.8
  Top Layer w9: 822.76,813.99 823.76,812.99 ; v2(1238.76,886.99) 1332.38,980.61 1465.13,980.61 J2.10
  Top Layer w10: v2(823.76,781.99) 823.76,812.99
  Top Layer w20: C10.1 786.76,813.99 822.76,813.99 U2.6
  Bottom Layer w9: v2(823.76,781.99) 823.76,881.99 861.76,919.99 1205.76,919.99 v2(1238.76,886.99)
LED-: J2.12 R9.2 R10.2 U2.3 | length 541.5
  Top Layer w9: R9.2@1149.76,892.99 1209.76,892.99 1313.13,996.36 1465.13,996.36 J2.12
  Top Layer w15: R9.2 R9.2@1149.76,892.99
  Top Layer w20: U2.3 1135.76,888.99 R9.2
NetC1_1: C1.1 U1.11 | length 155.1
  Top Layer w8: U1.11 2939.22,2148 3035,2148 C1.1
NetC1_2: C1.2 U1.10 | length 239.6
  Top Layer w8: U1.10 2931.95,2133 3000,2133 3051,2082 3074.33,2082 C1.2
NetC2_1: C2.1 U1.7 | length 274.8
  Top Layer w8: U1.7 2860.07,2140.09 2860.07,2136.04 2876.32,2119.79 2905.21,2119.79 3049.34,1975.66 C2.1
NetC5_1: C5.1 U1.4 | length 317.6
  Top Layer w8: U1.4 2824.64,2104.66 2847,2082.3 2847,1950.77 2915.38,1882.38 C5.1@2971.06,1882.38
NetC6_1: C6.1 U1.9 | length 137.9
  Top Layer w8: U1.9 2881.02,2162.36 2950.72,2092.66 C6.1
NetC7_1: C7.1 U1.12 | length 143.4
  Top Layer w8: U1.12 2999.77,2195.77 C7.1
NetC7_2: C7.2 U1.13 | length 189.7
  Top Layer w8: U1.13 2947.49,2288 3083.33,2288 C7.2
NetC8_1: C8.1 U1.16 | length 186.3
  Top Layer w8: U1.16 3004.01,2411.34 C8.1
NetC9_1: C9.1 U1.14 | length 176.2
  Top Layer w8: U1.14 2942.22,2305 3011,2305 C9.1
NetC9_2: C9.2 U1.15 | length 249.7
  Top Layer w8: U1.15 2935.95,2321 2976.13,2321 3043.8,2388.66 C9.2
NetC10_2: C10.2 C20.1 | length 80.4
  Top Layer w20: C20.1@698.76,884.99 699.76,885.99 C10.2
NetC12_1: C12.1 C16.1 R16.2 U5.2 U5.4 | length 1346.6
  Top Layer w30: R16.2 548,45 1294,45 1422,173 U5.4 U5.2 1768,173 C12.1
NetJ1_1: J1.1 P5.1 | length 1928.2
  Top Layer w6: J1.1 1965,896 2094,1025 2094,2563 P5.1
NetJ1_2: J1.2 P6.1 | length 1930.7
  Top Layer w6: P6.1 1669,2588 1669,1816.55 1752,1733.55 1752,938 1794,896 J1.2
NetJ1_3: J1.3 P5.2 | length 1803.5
  Top Layer w6: J1.3 1965.19,911.75 2083,1029.56 2083,2474 P5.2
NetJ1_4: J1.4 P6.2 | length 1802.2
  Top Layer w6: P6.2 1680,2499 1680,1821.11 1767,1734.11 1767,945 1800.25,911.75 J1.4
NetJ1_5: J1.5 P5.3 | length 1678.7
  Top Layer w6: J1.5 1965.38,927.5 2072,1034.11 2072,2385 P5.3
NetJ1_6: J1.6 P6.3 | length 1685.4
  Top Layer w6: P6.3 1749,2488 1691,2430 1691,1825.66 1779,1737.66 1779,955 1806.5,927.5 J1.6
NetJ1_7: J1.7 P5.4 | length 1554
  Top Layer w6: J1.7 1965.58,943.24 2061,1038.67 2061,2296 P5.4
NetJ1_8: J1.8 P6.4 | length 1543.1
  Top Layer w6: P6.4 1702,2321 1702,1830.22 1792,1740.22 1792,967.44 1816.2,943.24 J1.8
NetJ1_9: J1.9 P5.5 | length 1429.2
  Top Layer w6: J1.9 1965.77,958.99 2050,1043.23 2050,2207 P5.5
NetJ1_10: J1.10 P6.5 | length 1435.4
  Top Layer w6: P6.5 1740,2288 1713,2261 1713,1834.77 1803,1744.77 1803,972 1816.01,958.99 J1.10
NetJ1_11: J1.11 P5.6 | length 1304.5
  Top Layer w6: J1.11 1965.96,974.74 2039,1047.78 2039,2118 P5.6
NetJ1_12: J1.12 P6.6 | length 1298.7
  Top Layer w6: P6.6 1830,2127 1830,1780 1892,1718 1892,1005.44 1861.3,974.74 J1.12
NetJ1_13: J1.13 P5.7 | length 1179.7
  Top Layer w6: J1.13 1966.15,990.49 2028,1052.34 2028,2029 P5.7
NetJ1_14: J1.14 P6.7 | length 1178.1
  Top Layer w6: P6.7 1776,2088 1819,2045 1819,1775.44 1881,1713.44 1881,1010 1861.49,990.49 J1.14
NetJ1_15: J1.15 P5.8 | length 1059.1
  Top Layer w6: J1.15 1964.79,1006.24 2017,1058.44 2017,1940 P5.8 P5.8@1974,1988
NetJ1_16: J1.16 P6.8 | length 1048
  Top Layer w6: P6.8 1808,1949 1808,1770.89 1870,1708.89 1870,1016.55 1859.68,1006.24 J1.16
NetJ1_17: J1.17 P5.9 | length 905.3
  Top Layer w6: J1.17 1964.98,1021.98 1977,1034 1977,1880 P5.9
NetJ1_18: J1.18 P6.9 | length 917.5
  Top Layer w6: P6.9 1769,1794.33 1859,1704.33 1859,1031 1849.98,1021.98 J1.18
NetL1_2: L1.2 U2.1 | length 174.6
  Top Layer w20: U2.1 1003.76,782.99 1003.76,769.99 1063.62,710.13 L1.2
R\E\S\E\T\: P2.1 R12.1 U1.47 | length 2088.1
  Top Layer w8: U1.47 2690,2052.78 2690,2002 2907,1785 3398,1785 3612,1999 3780,1999 P2.1 ; v2(3362,1942) 3369,1949 R12.1
  Bottom Layer w8: v2(3362,1942) 3362,1821 v2(3404.49,1778.51)
REG_1V8: P8.5 U4.3 | length 376.8
  Top Layer w10: v2(853,420) 860.59,427.59 U4.3
  Bottom Layer w10: P8.5 850.99,417.99 v2(853,420)
REG_3V: P8.6 U3.3 | length 546.8
  Top Layer w10: v2(846,258) 881.98,258 U3.3
  Bottom Layer w10: P8.6 478.75,367 678,367 787,258 v2(846,258)
RST: J2.8 P8.10 R17.1 | length 1721.5
  Top Layer w9: R17.1 659,426 614,471 614,529 574,569 476.75,569 P8.10 427.76,630.99 466.76,669.99 597.76,669.99 690.76,576.99 1103.76,576.99 1278.76,751.99 1278.76,894.99 1348.25,964.49 J2.8
SCK: P2.3 R14.1 U1.1 | length 1897.6
  Top Layer w8: U1.1 2821,2043.51 2821,1940 2950,1811 3367,1811 3750,2194 P2.3
  Top Layer w10: R14.1 3509,2434 3597,2346 3819,2346 3846,2319 3846,2255 P2.3
SDA: P2.2 R13.1 U1.48 | length 1984.7
  Top Layer w8: U1.48 2808,1998.05 2808,1934.62 2944.62,1798 3372.38,1798 3671.38,2097 3782,2097 P2.2
  Top Layer w10: R13.1 3609,2445 3813,2445 3870,2388 3870,2179 P2.2
SENSE0: P4.12 U1.26 | length 686.2
  Top Layer w8: P4.12 2422,2435 2652.22,2435 U1.26
SENSE1: P4.11 U1.27 | length 640.2
  Top Layer w8: P4.11@2171,2588 P4.11 2335,2422 2642.95,2422 U1.27
SENSE2: P4.10 U1.28 | length 590.3
  Top Layer w8: P4.10 2249,2408 2634.68,2408 U1.28
SENSE3: P4.9 U1.29 | length 542.3
  Top Layer w8: P4.9 2632.41,2388 U1.29
SENSE4: P4.8 U1.30 | length 559.8
  Top Layer w8: P4.8 2439.85,2288 2518.85,2367 2631.14,2367 U1.30
SENSE5: P4.7 U1.31 | length 584
  Top Layer w8: P4.7 2358.23,2188 2524.23,2354 2621.86,2354 U1.31
SENSE6: P4.6 U1.32 | length 608.1
  Top Layer w8: P4.6 2276.62,2088 2529.62,2341 2612.59,2341 U1.32
SENSE7: P4.5 U1.33 | length 632.2
  Top Layer w8: P4.5 2195,1988 2535,2328 2603.32,2328 U1.33
SENSE8: P4.4 U1.34 | length 680.7
  Top Layer w8: P4.4 2333,2052 2333,2102 2540,2309 2600.05,2309 U1.34
SENSE9: P4.3 U1.35 | length 744.9
  Top Layer w8: P4.3 2357,1976 2357,2097.34 2553.66,2294 2592.78,2294 U1.35
SENSE10: P4.2 U1.36 | length 809.4
  Top Layer w8: P4.2 2370,1889 2370,2091.95 2550.05,2272 2592.51,2272 U1.36
SENSE11: P4.1 U1.37 | length 877.3
  Top Layer w8: P4.1 2383,1802 2383,2086.57 2513.43,2217 2589.05,2217 U1.37
SYNC: J2.6 P8.9 | length 1202.2
  Top Layer w9: P8.9 590.01,617.99 645.01,562.99 1109.55,562.99 1292.76,746.19 1292.76,885.99 1355.5,948.74 J2.6
VCC_3.3: C14.1 C15.1 C17.2 C18.2 L1.1 P9.1 R11.1 U2.5 U3.1 U4.1 U5.3 | length 2515.5
  Top Layer w15: C17.2 850.35,351.39 U3.1 ; C18.2 850.35,502.39 U4.1
  Top Layer w20: R11.1 721.76,313.76 774.99,366.99 ; v4@773,517.99 C18.2 ; v4@774.99,517.99 774.99,366.99 ; C15.1 C15.1@808.84,678.99 ; C17.2 774.99,366.99 ; v4(860,627) 860,678.99 ; U2.5 901.35,851.39 919.92,832.83 L1.1
  Top Layer w30: R11.1 908.01,216.99 P9.1 ; C15.1 863,681.99
  Top Layer w35: P9.1 1129,131 1188,190 1302,190 1440.95,328.95 1440.95,363.95 ; C14.1 1440.95,363.95 ; U5.3 1541.35,263.55 1440.95,363.95
  Top Layer w40: C15.1@808.84,678.99 860,678.99 ; 863,681.99 914.92,681.99 L1.1
  Bottom Layer w20: v4(774,500) 774,539 773,540 v4(860,627)
VCCIO: P8.1 P8.2 R11.2 | length 214.4
  Top Layer w35: P8.2 P8.1 640.76,217.99 R11.2
VCCIOLP: P7.1 P7.2 R16.1 | length 443.4
  Top Layer w30: P7.2 P7.1 320.92,65 R16.1
VCI: C3.1 P2.6 U1.6 | length 1188.5
  Top Layer w8: U1.6 2846.91,2126.93 v2@2898.42,2075.42 ; v2(2905,2078) 2902.42,2075.42 v2@2898.42,2075.42 ; C3.1 2934.34,2039.5 v2@2898.42,2075.42
  Bottom Layer w15: v2(2905,2078) 3369,2078 P2.6
VDDIO: C4.1 P2.5 R12.2 R13.2 R14.2 R15.2 U1.5 | length 1840.9
  Top Layer w8: U1.5 2882.8,2070.8 2882.8,2050.8 v2(2876,2044) ; C4.1 v2@2888.34,2044
  Top Layer w15: R12.2 3370,2556 v2(3635,2556)
  Bottom Layer w15: v2(2876,2044) 3435,2044 P2.5 3840.5,2449.5 3840.5,2524.5 3821,2544 3647,2544 v2(3635,2556)
pads on no net: C1.0 C2.0 C3.0 C4.0 C5.0 C6.0 C7.0 C8.0 C9.0 C14.0 C15.0 C16.0 J1.0 P7.3 P7.4 P7.5 P7.6 P7.7 P7.8 P7.9 P7.10 P7.13 P7.14 P7.15 P7.16 P7.18 P7.20 P7.23 P7.24 P7.26 P7.27 P7.28 P7.30 P8.3 P8.4 P8.7 P8.13 P8.14 P8.15 P8.17 P8.19 P8.20 P8.23 P8.24 P8.25 P8.26 P8.28 P8.29 U3.0 U3.4 U4.0 U4.4

## Polygon pours and split planes (outlines as drawn)
GND on Bottom Layer "Top-GND" (solid, remove dead copper, pour order 4): 450,10 112,10 cw(c112,110) 12,110 12,148 12,2645 cw(c112,2645) 112,2745 270,2745 3820,2745 cw(c3820,2645) 3920,2645 3920,82 cw(c3848,82) 3848,10 450,10
GND on Top Layer "Top-GND" (solid, remove dead copper, pour order 3): 450,10.48 112,10.48 cw(c112,110.48) 12,110.48 12,148.48 12,2645.48 cw(c112,2645.48) 112,2745.48 270,2745.48 3820,2745.48 cw(c3820,2645.48) 3920,2645.48 3920,82.48 cw(c3848,82.48) 3848,10.48 450,10.48

## Silkscreen, mask and mechanical layers (free items; w line width, h text height)
Top Overlay:
  lines w40: 1328,2369 1456,2534 ; 1454,2158 1456,2520 ; 1465,2529 1577,2383
  text "GND" at 3698,2606 h40 r90
  text "IPOD LCD MIPI Bridge V1.1 2001" at 77,2591 h50
  text "www.CircuitValley.com" at 71,2505 h50
  text "VCI" at 3706,2439 h40 r90
  text "VDDIO" at 3530,2367 h40
  text "/IRQ" at 3566,2270 h40
  text "SCK" at 3603,2173 h40
  text "SDA" at 3602,2078 h40
  text "USB" at 1307,1982 h100
  text "/RST" at 3566,1969 h40
Mechanical 1:
  lines w1: 0,50 ccw(c50,50) 50,0 139,0 3887,0 ccw(c3887,50) 3937,50 3937,2709 ccw(c3887,2709) 3887,2759 50,2759 ccw(c50,2709) 0,2709 0,50

## Text inside footprints (layer, text, board x,y; h text height)
P7: Top Overlay "32" at 87.93,1777.99 h50 r90; Top Overlay "31" at 187.93,1777.99 h50 r90; Top Overlay "1" at 187.93,117.99 h50 r90; Top Overlay "2" at 87.93,117.99 h50 r90
P8: Top Overlay "32" at 447.76,1777.99 h50 r90; Top Overlay "31" at 547.76,1777.99 h50 r90; Top Overlay "1" at 547.76,117.99 h50 r90; Top Overlay "2" at 447.76,117.99 h50 r90